# EAGLE board Program_Counter (EAGLE 9.3.2)
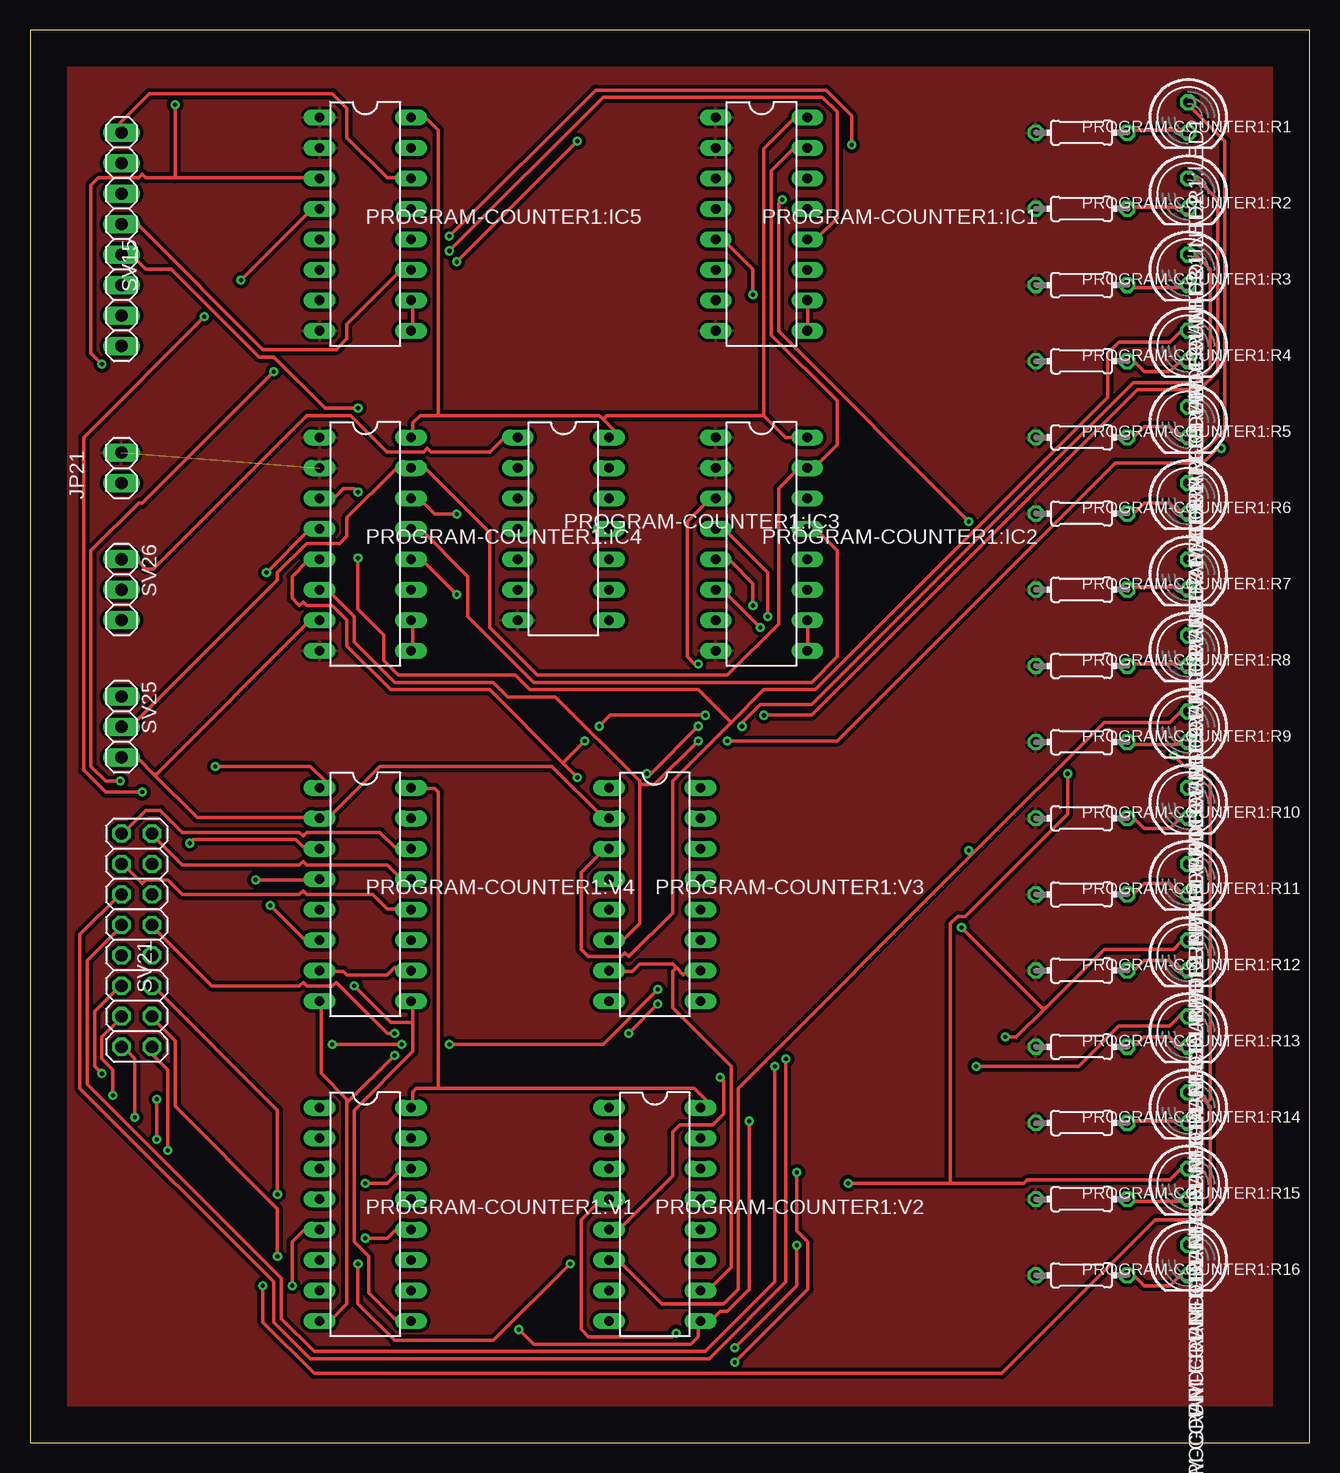
[diagram p0: board, top side]
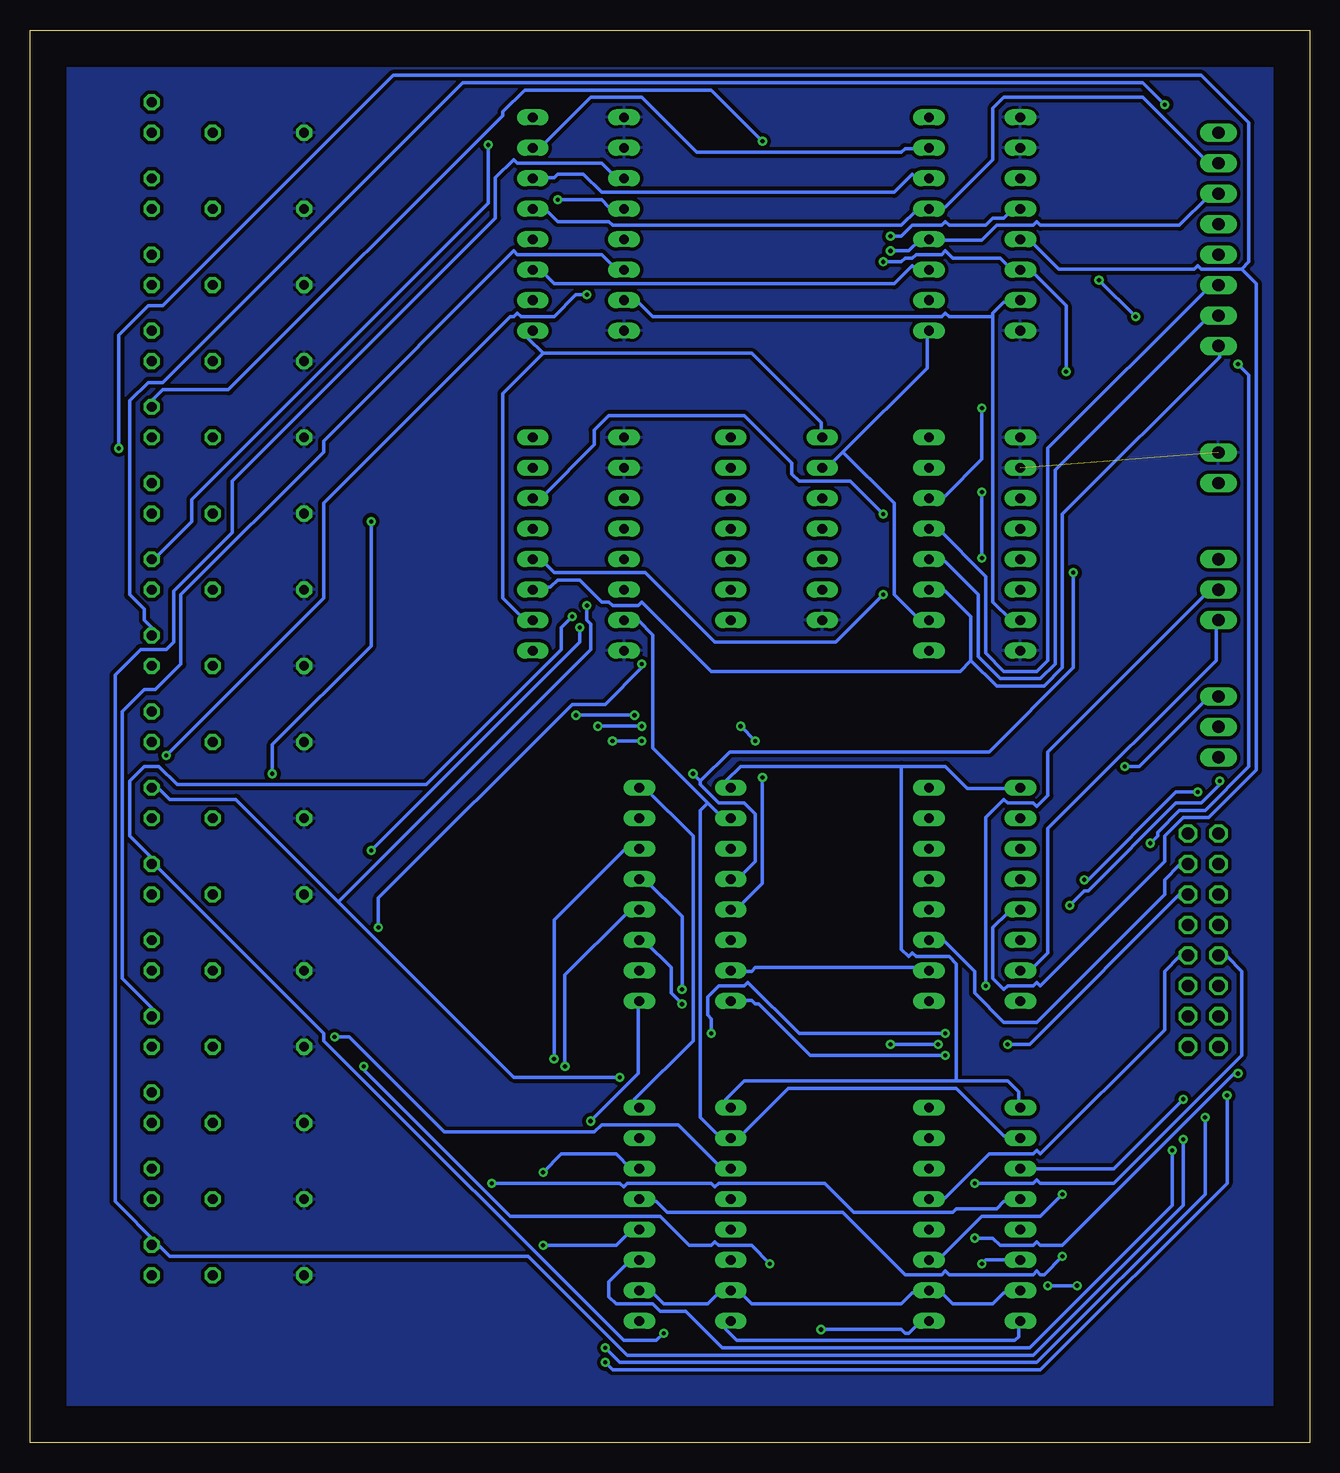
[diagram p1: board, bottom side, seen from below]

Size 106.66 x 117.78 mm. Coordinates in mm from the lower left corner, seen from the top.
Outline: 0,0 106.66,0 106.66,117.78 0,117.78 0,0
Copper layers (1*16): Top 0.035mm / dielectric 1.5mm / Bottom 0.035mm
Design rules "Endustriyel": minimum track width 12mil, minimum drill 0.35mm, track to track 12mil, track to pad 12mil, pad to pad 12mil, via to via 12mil, smd to smd 6mil, copper to edge 120mil, drill to drill 12mil, minimum pad ring 10mil, minimum via ring 8mil, stop-mask expansion 4mil, vias tented up to drill 0mil, thermal gap 10mil
Net classes: 0 default: width 0.254 mm

## Footprints (pad centres in the part's own frame; a part is rotated, then mirrored left to right if it is on the bottom)
1X02 = drill 1.016 long: 1 -1.27,0; 2 1.27,0
DIL16 = drill 0.813 long: 1 -8.89,-3.81; 2 -6.35,-3.81; 3 -3.81,-3.81; 4 -1.27,-3.81; 5 1.27,-3.81; 6 3.81,-3.81; 7 6.35,-3.81; 8 8.89,-3.81; 9 8.89,3.81; 10 6.35,3.81; 11 3.81,3.81; 12 1.27,3.81; 13 -1.27,3.81; 14 -3.81,3.81; 15 -6.35,3.81; 16 -8.89,3.81
DIL14 = drill 0.813 long: 1 -7.62,-3.81; 2 -5.08,-3.81; 3 -2.54,-3.81; 4 0,-3.81; 5 2.54,-3.81; 6 5.08,-3.81; 7 7.62,-3.81; 8 7.62,3.81; 9 5.08,3.81; 10 2.54,3.81; 11 0,3.81; 12 -2.54,3.81; 13 -5.08,3.81; 14 -7.62,3.81
LED5MM = drill 0.813 octagon: A -1.27,0; K 1.27,0
0204/7 = drill 0.813 octagon: 1 -3.81,0; 2 3.81,0
1X08 = drill 1.016 long: 1 -8.89,0; 2 -6.35,0; 3 -3.81,0; 4 -1.27,0; 5 1.27,0; 6 3.81,0; 7 6.35,0; 8 8.89,0
2X08 = drill 1.016 octagon: 1 -8.89,-1.27; 2 -8.89,1.27; 3 -6.35,-1.27; 4 -6.35,1.27; 5 -3.81,-1.27; 6 -3.81,1.27; 7 -1.27,-1.27; 8 -1.27,1.27; 9 1.27,-1.27; 10 1.27,1.27; 11 3.81,-1.27; 12 3.81,1.27; 13 6.35,-1.27; 14 6.35,1.27; 15 8.89,-1.27; 16 8.89,1.27
1X03 = drill 1.016 long: 1 -2.54,0; 2 0,0; 3 2.54,0

## Placement (x,y rotation side)
JP21  [1X02]  7.62,81.28 90 top
PROGRAM-COUNTER1:IC1  74HC173N  [DIL16]  60.96,101.6 270 top
PROGRAM-COUNTER1:IC2  74HC173N  [DIL16]  60.96,74.93 270 top
PROGRAM-COUNTER1:IC3  74AC04N  [DIL14]  44.45,76.2 270 top
PROGRAM-COUNTER1:IC4  74HC173N  [DIL16]  27.94,74.93 270 top
PROGRAM-COUNTER1:IC5  74HC173N  [DIL16]  27.94,101.6 270 top
PROGRAM-COUNTER1:LED1  [LED5MM]  96.52,110.49 270 top
PROGRAM-COUNTER1:LED2  [LED5MM]  96.52,104.14 270 top
PROGRAM-COUNTER1:LED3  [LED5MM]  96.52,97.79 270 top
PROGRAM-COUNTER1:LED4  [LED5MM]  96.52,91.44 270 top
PROGRAM-COUNTER1:LED5  [LED5MM]  96.52,85.09 270 top
PROGRAM-COUNTER1:LED6  [LED5MM]  96.52,78.74 270 top
PROGRAM-COUNTER1:LED7  [LED5MM]  96.52,72.39 270 top
PROGRAM-COUNTER1:LED8  [LED5MM]  96.52,66.04 270 top
PROGRAM-COUNTER1:LED9  [LED5MM]  96.52,59.69 270 top
PROGRAM-COUNTER1:LED10  [LED5MM]  96.52,53.34 270 top
PROGRAM-COUNTER1:LED11  [LED5MM]  96.52,46.99 270 top
PROGRAM-COUNTER1:LED12  [LED5MM]  96.52,40.64 270 top
PROGRAM-COUNTER1:LED13  [LED5MM]  96.52,34.29 270 top
PROGRAM-COUNTER1:LED14  [LED5MM]  96.52,27.94 270 top
PROGRAM-COUNTER1:LED15  [LED5MM]  96.52,21.59 270 top
PROGRAM-COUNTER1:LED16  [LED5MM]  96.52,15.24 270 top
PROGRAM-COUNTER1:R1  220  [0204/7]  87.63,109.22 0 top
PROGRAM-COUNTER1:R2  220  [0204/7]  87.63,102.87 0 top
PROGRAM-COUNTER1:R3  220  [0204/7]  87.63,96.52 0 top
PROGRAM-COUNTER1:R4  220  [0204/7]  87.63,90.17 0 top
PROGRAM-COUNTER1:R5  220  [0204/7]  87.63,83.82 0 top
PROGRAM-COUNTER1:R6  220  [0204/7]  87.63,77.47 0 top
PROGRAM-COUNTER1:R7  220  [0204/7]  87.63,71.12 0 top
PROGRAM-COUNTER1:R8  220  [0204/7]  87.63,64.77 0 top
PROGRAM-COUNTER1:R9  220  [0204/7]  87.63,58.42 0 top
PROGRAM-COUNTER1:R10  220  [0204/7]  87.63,52.07 0 top
PROGRAM-COUNTER1:R11  220  [0204/7]  87.63,45.72 0 top
PROGRAM-COUNTER1:R12  220  [0204/7]  87.63,39.37 0 top
PROGRAM-COUNTER1:R13  220  [0204/7]  87.63,33.02 0 top
PROGRAM-COUNTER1:R14  220  [0204/7]  87.63,26.67 0 top
PROGRAM-COUNTER1:R15  220  [0204/7]  87.63,20.32 0 top
PROGRAM-COUNTER1:R16  220  [0204/7]  87.63,13.97 0 top
PROGRAM-COUNTER1:V1  74161N  [DIL16]  27.94,19.05 270 top
PROGRAM-COUNTER1:V2  74161N  [DIL16]  52.07,19.05 270 top
PROGRAM-COUNTER1:V3  74161N  [DIL16]  52.07,45.72 270 top
PROGRAM-COUNTER1:V4  74161N  [DIL16]  27.94,45.72 270 top
SV15  [1X08]  7.62,100.33 270 top
SV21  [2X08]  8.89,41.91 270 top
SV25  [1X03]  7.62,59.69 270 top
SV26  [1X03]  7.62,71.12 270 top

## Library data of the parts
JP21 = pinhead
PROGRAM-COUNTER1:IC1-PROGRAM-COUNTER1:IC5 = 74xx-eu
PROGRAM-COUNTER1:LED1-PROGRAM-COUNTER1:LED16 = led
PROGRAM-COUNTER1:R1-PROGRAM-COUNTER1:R16 = rcl; SPICEPREFIX: R
PROGRAM-COUNTER1:V1-PROGRAM-COUNTER1:V4 = 74ttl-din
SV15 SV21 SV25 SV26 = pinhead; OC_FARNELL: unknown; OC_NEWARK: unknown

## Nets
8B_1: PROGRAM-COUNTER1:IC1.14 PROGRAM-COUNTER1:IC5.14 SV15.1
8B_2: PROGRAM-COUNTER1:IC1.13 PROGRAM-COUNTER1:IC5.13 SV15.2
8B_3: PROGRAM-COUNTER1:IC1.12 PROGRAM-COUNTER1:IC5.12 SV15.3
8B_4: PROGRAM-COUNTER1:IC1.11 PROGRAM-COUNTER1:IC5.11 SV15.4
8B_5: PROGRAM-COUNTER1:IC2.14 PROGRAM-COUNTER1:IC4.14 SV15.5
8B_6: PROGRAM-COUNTER1:IC2.13 PROGRAM-COUNTER1:IC4.13 SV15.6
8B_7: PROGRAM-COUNTER1:IC2.12 PROGRAM-COUNTER1:IC4.12 SV15.7
8B_8: PROGRAM-COUNTER1:IC2.11 PROGRAM-COUNTER1:IC4.11 SV15.8
CLK: PROGRAM-COUNTER1:IC1.7 PROGRAM-COUNTER1:IC2.7 PROGRAM-COUNTER1:IC4.7 PROGRAM-COUNTER1:IC5.7 PROGRAM-COUNTER1:V1.2 PROGRAM-COUNTER1:V2.2 PROGRAM-COUNTER1:V3.2 PROGRAM-COUNTER1:V4.2 SV25.3
CLR: PROGRAM-COUNTER1:IC1.15 PROGRAM-COUNTER1:IC2.15 PROGRAM-COUNTER1:IC4.15 PROGRAM-COUNTER1:IC5.15 SV25.2
COUNT: PROGRAM-COUNTER1:V1.7 PROGRAM-COUNTER1:V1.10 PROGRAM-COUNTER1:V2.7 PROGRAM-COUNTER1:V2.10 PROGRAM-COUNTER1:V3.7 PROGRAM-COUNTER1:V3.10 PROGRAM-COUNTER1:V4.7 PROGRAM-COUNTER1:V4.10 SV26.3
GND: JP21.2 PROGRAM-COUNTER1:IC1.1 PROGRAM-COUNTER1:IC1.2 PROGRAM-COUNTER1:IC1.8 PROGRAM-COUNTER1:IC2.1 PROGRAM-COUNTER1:IC2.2 PROGRAM-COUNTER1:IC2.8 PROGRAM-COUNTER1:IC3.7 PROGRAM-COUNTER1:IC4.1 PROGRAM-COUNTER1:IC4.2 PROGRAM-COUNTER1:IC4.8 PROGRAM-COUNTER1:IC5.1 PROGRAM-COUNTER1:IC5.2 PROGRAM-COUNTER1:IC5.8 PROGRAM-COUNTER1:R1.1 PROGRAM-COUNTER1:R2.1 PROGRAM-COUNTER1:R3.1 PROGRAM-COUNTER1:R4.1 PROGRAM-COUNTER1:R5.1 PROGRAM-COUNTER1:R6.1 PROGRAM-COUNTER1:R7.1 PROGRAM-COUNTER1:R8.1 PROGRAM-COUNTER1:R9.1 PROGRAM-COUNTER1:R10.1 PROGRAM-COUNTER1:R11.1 PROGRAM-COUNTER1:R12.1 PROGRAM-COUNTER1:R13.1 PROGRAM-COUNTER1:R14.1 PROGRAM-COUNTER1:R15.1 PROGRAM-COUNTER1:R16.1
N$1: PROGRAM-COUNTER1:V4.14 SV21.1
N$2: PROGRAM-COUNTER1:V4.13 SV21.2
N$3: PROGRAM-COUNTER1:V4.12 SV21.3
N$4: PROGRAM-COUNTER1:V4.11 SV21.4
N$5: PROGRAM-COUNTER1:V3.14 SV21.5
N$6: PROGRAM-COUNTER1:V3.13 SV21.6
N$7: PROGRAM-COUNTER1:V3.12 SV21.7
N$8: PROGRAM-COUNTER1:V3.11 SV21.8
N$9: PROGRAM-COUNTER1:V1.14 SV21.9
N$10: PROGRAM-COUNTER1:V1.13 SV21.10
N$11: PROGRAM-COUNTER1:V1.12 SV21.11
N$12: PROGRAM-COUNTER1:V1.11 SV21.12
N$13: PROGRAM-COUNTER1:V2.14 SV21.13
N$14: PROGRAM-COUNTER1:V2.13 SV21.14
N$15: PROGRAM-COUNTER1:V2.12 SV21.15
N$16: PROGRAM-COUNTER1:V2.11 SV21.16
PC_LE: PROGRAM-COUNTER1:V1.9 PROGRAM-COUNTER1:V2.9 PROGRAM-COUNTER1:V3.9 PROGRAM-COUNTER1:V4.9 SV26.2
PC_LRS: PROGRAM-COUNTER1:IC1.9 PROGRAM-COUNTER1:IC1.10 PROGRAM-COUNTER1:IC2.9 PROGRAM-COUNTER1:IC2.10 PROGRAM-COUNTER1:IC3.1 SV26.1
PROGRAM-COUNTER1:+UB: PROGRAM-COUNTER1:V1.16 PROGRAM-COUNTER1:V2.16 PROGRAM-COUNTER1:V3.16 PROGRAM-COUNTER1:V4.16
PROGRAM-COUNTER1:-UB: PROGRAM-COUNTER1:V1.8 PROGRAM-COUNTER1:V2.8 PROGRAM-COUNTER1:V3.8 PROGRAM-COUNTER1:V4.8
PROGRAM-COUNTER1:N$1: PROGRAM-COUNTER1:IC1.6 PROGRAM-COUNTER1:LED13.A PROGRAM-COUNTER1:V1.6
PROGRAM-COUNTER1:N$2: PROGRAM-COUNTER1:IC2.6 PROGRAM-COUNTER1:LED9.A PROGRAM-COUNTER1:V2.6
PROGRAM-COUNTER1:N$3: PROGRAM-COUNTER1:IC2.5 PROGRAM-COUNTER1:LED10.A PROGRAM-COUNTER1:V2.5
PROGRAM-COUNTER1:N$4: PROGRAM-COUNTER1:IC2.4 PROGRAM-COUNTER1:LED11.A PROGRAM-COUNTER1:V2.4
PROGRAM-COUNTER1:N$5: PROGRAM-COUNTER1:IC2.3 PROGRAM-COUNTER1:LED12.A PROGRAM-COUNTER1:V2.3
PROGRAM-COUNTER1:N$6: PROGRAM-COUNTER1:IC1.5 PROGRAM-COUNTER1:LED14.A PROGRAM-COUNTER1:V1.5
PROGRAM-COUNTER1:N$7: PROGRAM-COUNTER1:IC1.4 PROGRAM-COUNTER1:LED15.A PROGRAM-COUNTER1:V1.4
PROGRAM-COUNTER1:N$8: PROGRAM-COUNTER1:IC1.3 PROGRAM-COUNTER1:LED16.A PROGRAM-COUNTER1:V1.3
PROGRAM-COUNTER1:N$17: PROGRAM-COUNTER1:IC4.6 PROGRAM-COUNTER1:LED1.A PROGRAM-COUNTER1:V3.6
PROGRAM-COUNTER1:N$18: PROGRAM-COUNTER1:IC4.5 PROGRAM-COUNTER1:LED2.A PROGRAM-COUNTER1:V3.5
PROGRAM-COUNTER1:N$19: PROGRAM-COUNTER1:IC4.4 PROGRAM-COUNTER1:LED3.A PROGRAM-COUNTER1:V3.4
PROGRAM-COUNTER1:N$20: PROGRAM-COUNTER1:IC4.3 PROGRAM-COUNTER1:LED4.A PROGRAM-COUNTER1:V3.3
PROGRAM-COUNTER1:N$25: PROGRAM-COUNTER1:IC5.6 PROGRAM-COUNTER1:LED5.A PROGRAM-COUNTER1:V4.6
PROGRAM-COUNTER1:N$26: PROGRAM-COUNTER1:IC5.5 PROGRAM-COUNTER1:LED6.A PROGRAM-COUNTER1:V4.5
PROGRAM-COUNTER1:N$27: PROGRAM-COUNTER1:IC5.4 PROGRAM-COUNTER1:LED7.A PROGRAM-COUNTER1:V4.4
PROGRAM-COUNTER1:N$28: PROGRAM-COUNTER1:IC5.3 PROGRAM-COUNTER1:LED8.A PROGRAM-COUNTER1:V4.3
PROGRAM-COUNTER1:N$45: PROGRAM-COUNTER1:LED9.K PROGRAM-COUNTER1:R9.2
PROGRAM-COUNTER1:N$46: PROGRAM-COUNTER1:LED10.K PROGRAM-COUNTER1:R10.2
PROGRAM-COUNTER1:N$47: PROGRAM-COUNTER1:LED11.K PROGRAM-COUNTER1:R11.2
PROGRAM-COUNTER1:N$48: PROGRAM-COUNTER1:LED12.K PROGRAM-COUNTER1:R12.2
PROGRAM-COUNTER1:N$49: PROGRAM-COUNTER1:LED13.K PROGRAM-COUNTER1:R13.2
PROGRAM-COUNTER1:N$50: PROGRAM-COUNTER1:LED14.K PROGRAM-COUNTER1:R14.2
PROGRAM-COUNTER1:N$51: PROGRAM-COUNTER1:LED15.K PROGRAM-COUNTER1:R15.2
PROGRAM-COUNTER1:N$52: PROGRAM-COUNTER1:LED16.K PROGRAM-COUNTER1:R16.2
PROGRAM-COUNTER1:N$53: PROGRAM-COUNTER1:LED1.K PROGRAM-COUNTER1:R1.2
PROGRAM-COUNTER1:N$54: PROGRAM-COUNTER1:LED2.K PROGRAM-COUNTER1:R2.2
PROGRAM-COUNTER1:N$55: PROGRAM-COUNTER1:LED3.K PROGRAM-COUNTER1:R3.2
PROGRAM-COUNTER1:N$56: PROGRAM-COUNTER1:LED4.K PROGRAM-COUNTER1:R4.2
PROGRAM-COUNTER1:N$57: PROGRAM-COUNTER1:LED5.K PROGRAM-COUNTER1:R5.2
PROGRAM-COUNTER1:N$58: PROGRAM-COUNTER1:LED6.K PROGRAM-COUNTER1:R6.2
PROGRAM-COUNTER1:N$59: PROGRAM-COUNTER1:LED7.K PROGRAM-COUNTER1:R7.2
PROGRAM-COUNTER1:N$60: PROGRAM-COUNTER1:LED8.K PROGRAM-COUNTER1:R8.2
PROGRAM-COUNTER1:VCC: PROGRAM-COUNTER1:IC1.16 PROGRAM-COUNTER1:IC2.16 PROGRAM-COUNTER1:IC3.14 PROGRAM-COUNTER1:IC4.16 PROGRAM-COUNTER1:IC5.16
PROGRAM-COUNTER1:|LRS: PROGRAM-COUNTER1:IC3.2 PROGRAM-COUNTER1:IC4.9 PROGRAM-COUNTER1:IC4.10 PROGRAM-COUNTER1:IC5.9 PROGRAM-COUNTER1:IC5.10
VCC: JP21.1
|CLR: PROGRAM-COUNTER1:V1.1 PROGRAM-COUNTER1:V2.1 PROGRAM-COUNTER1:V3.1 PROGRAM-COUNTER1:V4.1 SV25.1

## Tracks (layer width: path | path; a pad name or v marks a point on that pad's centre or on a via)
8B_1
  Top 0.305: PROGRAM-COUNTER1:IC5.14 31.6,105.46 29.77,105.46 26.42,108.81 26.42,111.25 25.2,112.47 9.96,112.47 7.52,110.03 7.52,109.42 SV15.1
  Bottom 0.305: PROGRAM-COUNTER1:IC1.14 64.52,105.46 62.99,105.46 62.69,105.77 60.55,105.77 59.03,104.24 34.65,104.24 33.12,105.77 32.82,105.46 31.9,105.46 PROGRAM-COUNTER1:IC5.14
8B_2
  Bottom 0.305: SV15.2 8.43,106.68 13.92,112.17 25.5,112.17 26.42,111.25 26.42,106.98 30.38,103.02 31.6,103.02 PROGRAM-COUNTER1:IC5.13 31.9,102.72 32.82,102.72 34.04,101.5 58.12,101.5 58.42,101.8 62.69,101.8 63.6,102.72 64.52,102.72 PROGRAM-COUNTER1:IC1.13
8B_3  (via drill 0.35)
  Top 0.305: v34.95,99.36 47.75,112.17 66.04,112.17 67.26,110.95 67.26,102.11 65.73,100.58 64.82,100.58 PROGRAM-COUNTER1:IC1.12
  Bottom 0.305: SV15.3 7.82,103.94 8.43,103.94 10.87,101.5 22.45,101.5 22.76,101.8 23.06,101.5 26.11,101.5 27.33,100.28 31.6,100.28 PROGRAM-COUNTER1:IC5.12 31.9,100.28 32.51,100.28 33.43,99.36 v34.95,99.36
8B_4
  Top 0.305: PROGRAM-COUNTER1:IC5.11 31.6,97.54 30.68,97.54 26.42,93.27 26.42,92.05 25.5,91.13 19.41,91.13 9.04,101.5 7.82,101.5 SV15.4
  Bottom 0.305: PROGRAM-COUNTER1:IC1.11 64.52,97.54 63.91,97.54 62.99,96.62 34.65,96.62 33.12,98.15 32.82,97.84 31.9,97.84 PROGRAM-COUNTER1:IC5.11
8B_5  (via drill 0.35)
  Top 0.305: v27.33,86.26 24.59,86.26 20.32,90.53 19.1,90.53 11.79,97.84 9.65,97.84 8.43,99.06 SV15.5 | v35.56,77.42 33.73,77.42 32.51,78.64 31.9,78.64 PROGRAM-COUNTER1:IC4.14
  Bottom 0.305: v27.33,86.26 27.33,81.99 30.38,78.94 31.6,78.94 PROGRAM-COUNTER1:IC4.14 | v35.56,77.42 38.3,80.16 42.57,80.16 43.18,80.77 43.18,81.69 47.14,85.65 58.42,85.65 59.64,84.43 59.64,83.21 63.91,78.94 64.52,78.94 PROGRAM-COUNTER1:IC2.14
8B_6
  Top 0.305: PROGRAM-COUNTER1:IC2.13 65.43,76.2 67.26,74.37 67.26,65.53 65.13,63.4 41.96,63.4 36.47,68.88 36.47,72.24 32.51,76.2 PROGRAM-COUNTER1:IC4.13
  Bottom 0.305: PROGRAM-COUNTER1:IC4.13 30.99,76.2 27.03,72.24 27.03,65.84 25.5,64.31 22.76,64.31 21.84,65.23 21.84,82.91 8.43,96.32 7.82,96.32 SV15.6
8B_7  (via drill 0.35)
  Top 0.305: v35.56,70.71 32.82,73.46 31.9,73.46 PROGRAM-COUNTER1:IC4.12
  Bottom 0.305: PROGRAM-COUNTER1:IC4.12 31.6,73.46 30.38,73.46 27.64,70.71 27.64,65.53 25.81,63.7 22.45,63.7 21.23,64.92 21.23,81.08 8.43,93.88 7.82,93.88 SV15.7 | v35.56,70.71 39.52,66.75 49.58,66.75 55.37,72.54 62.99,72.54 63.91,73.46 64.52,73.46 PROGRAM-COUNTER1:IC2.12
8B_8
  Bottom 0.305: 28.25,65.23 28.25,68.88 30.38,71.02 31.6,71.02 PROGRAM-COUNTER1:IC4.11 | 28.25,65.23 26.11,63.09 22.15,63.09 20.62,64.62 20.62,77.42 7.52,90.53 7.52,91.44 SV15.8 | 28.25,65.23 29.16,64.31 49.89,64.31 55.68,70.1 55.98,69.8 58.12,69.8 58.42,70.1 59.03,70.1 60.86,71.93 62.69,71.93 63.3,71.32 64.52,71.32 PROGRAM-COUNTER1:IC2.11
CLK
  Top 0.305: 10.26,55.78 9.04,57 7.82,57 SV25.3 | 10.26,55.78 13.92,52.12 23.98,52.12 PROGRAM-COUNTER1:V4.2 24.28,52.12 24.89,52.12 29.16,56.39 43.48,56.39 47.75,52.12 48.06,52.12 PROGRAM-COUNTER1:V3.2 | PROGRAM-COUNTER1:IC4.7 23.37,68.58 10.57,55.78 10.26,55.78
  Bottom 0.305: PROGRAM-COUNTER1:V1.2 24.28,25.6 25.5,25.6 29.46,29.57 43.48,29.57 47.45,25.6 48.06,25.6 PROGRAM-COUNTER1:V2.2 48.36,25.6 49.28,25.6 50.8,27.13 50.8,52.73 50.19,53.34 | 50.19,53.34 54.76,57.91 54.76,67.36 55.98,68.58 PROGRAM-COUNTER1:IC2.7 | 50.19,53.34 48.97,52.12 48.36,52.12 PROGRAM-COUNTER1:V3.2 | 26.42,93.88 26.42,70.1 24.89,68.58 PROGRAM-COUNTER1:IC4.7 | 26.42,93.88 26.42,94.18 25.5,95.1 24.28,95.1 PROGRAM-COUNTER1:IC5.7 | 26.42,93.88 30.07,93.88 30.38,94.18 30.68,93.88 54.76,93.88 55.98,95.1 56.9,95.1 PROGRAM-COUNTER1:IC1.7
CLR
  Top 0.305: SV25.2 7.82,59.74 8.43,59.74 20.62,71.93 20.62,72.54 23.06,74.98 25.81,74.98 26.42,75.59 26.42,77.11 30.38,81.08 31.6,81.08 PROGRAM-COUNTER1:IC4.15 31.9,81.08 33.12,81.08 38.3,75.89 38.3,67.97 42.27,64.01 58.12,64.01 62.38,68.27 62.38,79.55 63.91,81.08 64.52,81.08 PROGRAM-COUNTER1:IC2.15 64.82,81.38 65.43,81.38 67.26,83.21 67.26,86.87 61.77,92.35 61.77,106.07 63.6,107.9 64.52,107.9 PROGRAM-COUNTER1:IC1.15
  Bottom 0.305: PROGRAM-COUNTER1:IC5.15 31.9,107.9 33.73,107.9 34.04,107.59 51.11,107.59 55.68,112.17 59.94,112.17 63.91,108.2 64.52,108.2 PROGRAM-COUNTER1:IC1.15
COUNT
  Top 0.305: 53.85,39.62 54.46,39.01 54.76,39.32 55.68,39.32 PROGRAM-COUNTER1:V3.10 | 53.85,39.62 53.54,39.93 50.8,39.93 50.19,39.32 48.36,39.32 PROGRAM-COUNTER1:V3.7 | PROGRAM-COUNTER1:V4.7 24.28,39.32 26.11,39.32 26.42,39.01 29.77,39.01 30.38,39.62 31.6,39.62 PROGRAM-COUNTER1:V4.10 | 53.85,39.62 53.54,39.32 53.54,36.27 58.42,31.39 58.42,14.63 56.59,12.8 55.98,12.8 PROGRAM-COUNTER1:V2.10
  Bottom 0.305: PROGRAM-COUNTER1:V1.7 24.28,12.5 25.5,12.5 26.42,11.58 29.77,11.58 30.68,12.5 31.6,12.5 PROGRAM-COUNTER1:V1.10 31.9,12.5 33.12,12.5 34.04,11.58 46.53,11.58 47.45,12.5 48.06,12.5 PROGRAM-COUNTER1:V2.7 48.36,12.5 49.28,12.5 50.19,11.58 53.85,11.58 54.76,12.5 55.68,12.5 PROGRAM-COUNTER1:V2.10 | SV26.3 7.82,68.58 7.82,65.23 21.84,51.21 21.84,40.84 23.06,39.62 23.98,39.62 PROGRAM-COUNTER1:V4.7 | PROGRAM-COUNTER1:V3.7 48.06,39.32 46.53,39.32 46.23,39.62 31.9,39.62 PROGRAM-COUNTER1:V4.10
GND  (1 unrouted)
  pour Bottom: -2.54,120.65 109.22,120.65 109.22,-2.54 -2.54,-2.54
  pour Top: -5.08,121.92 -5.08,-6.35 111.76,-6.35 111.76,121.92
N$1
  Top 0.305: PROGRAM-COUNTER1:V4.14 31.6,49.68 30.38,49.68 29.16,50.9 23.06,50.9 22.76,50.6 22.45,50.9 12.7,50.9 10.87,52.73 9.65,52.73 8.13,51.21 7.82,51.21 7.52,50.9 SV21.1
N$2
  Top 0.305: PROGRAM-COUNTER1:V4.13 31.6,47.24 30.68,47.24 29.77,48.16 23.06,48.16 22.76,48.46 22.45,48.16 12.7,48.16 10.57,50.29 10.26,50.29 9.96,50.6 SV21.2
N$3
  Top 0.305: PROGRAM-COUNTER1:V4.12 31.6,44.5 29.77,44.5 28.55,45.72 23.06,45.72 22.76,46.03 22.45,45.72 12.7,45.72 11.48,46.94 9.65,46.94 9.35,46.63 8.13,47.85 7.82,47.85 7.52,48.16 SV21.3
N$4
  Bottom 0.305: PROGRAM-COUNTER1:V4.11 31.6,41.76 30.38,41.76 27.94,39.32 27.94,37.49 25.5,35.05 22.76,35.05 12.09,45.72 12.09,46.94 10.87,48.16 10.26,48.16 SV21.4
N$5  (via drill 0.35)
  Top 0.305: v62.99,32 62.99,13.41 56.59,7.01 23.37,7.01 20.32,10.06 20.32,13.41 4.17,29.57 4.17,42.37 7.52,45.72 SV21.5
  Bottom 0.305: v62.99,32 62.99,43.59 57.2,49.38 55.98,49.38 PROGRAM-COUNTER1:V3.14
N$6  (via drill 0.35)
  Top 0.305: v52.32,37.8 47.75,33.22 v34.95,33.22 | v25.2,33.22 v30.99,33.22
  Bottom 0.305: v52.32,37.8 52.32,43.89 55.37,46.94 55.68,46.94 PROGRAM-COUNTER1:V3.13 | v30.99,33.22 v34.95,33.22 | v25.2,33.22 23.37,33.22 10.87,45.72 SV21.6
N$7  (via drill 0.35)
  Top 0.305: v62.08,31.39 62.08,13.41 56.29,7.62 23.67,7.62 20.93,10.36 20.93,13.72 4.78,29.87 4.78,40.23 7.21,42.67 7.21,42.98 7.52,43.28 SV21.7
  Bottom 0.305: v62.08,31.39 62.08,39.01 56.9,44.2 55.98,44.2 PROGRAM-COUNTER1:V3.12
N$8  (via drill 0.35)
  Top 0.305: v49.89,34.14 v52.32,36.58 | v30.38,34.14 29.77,34.14 25.5,38.41 25.2,38.1 23.06,38.1 22.76,38.41 22.45,38.1 15.14,38.1 10.57,42.67 10.26,42.67 9.96,42.98 SV21.8
  Bottom 0.305: v52.32,36.58 53.24,37.49 53.24,39.62 55.37,41.76 55.68,41.76 PROGRAM-COUNTER1:V3.11 | v49.89,34.14 49.89,35.36 50.19,35.66 50.19,37.19 49.28,38.1 47.14,38.1 46.84,38.41 42.57,34.14 v30.38,34.14
N$9  (via drill 0.35)
  Top 0.305: PROGRAM-COUNTER1:V1.14 30.99,22.86 29.77,21.64 v27.94,21.64
  Bottom 0.305: v27.94,21.64 23.06,21.64 22.76,21.95 22.45,21.64 16.36,21.64 5.69,32.31 5.69,39.32 6.91,40.54 7.52,40.54 SV21.9
N$10
  Bottom 0.305: PROGRAM-COUNTER1:V1.13 31.6,20.42 30.38,20.42 26.72,24.08 23.06,24.08 22.76,24.38 22.45,24.08 12.09,34.44 12.09,39.32 10.87,40.54 10.26,40.54 SV21.10
N$11  (via drill 0.35)
  Top 0.305: v27.94,17.07 29.77,17.07 30.38,17.68 31.6,17.68 PROGRAM-COUNTER1:V1.12 | v5.99,30.79 5.38,31.39 5.38,35.97 7.52,38.1 SV21.11
  Bottom 0.305: v27.94,17.07 26.42,17.07 25.81,16.46 23.06,16.46 22.76,16.76 22.45,16.46 20.62,16.46 6.3,30.79 v5.99,30.79
N$12  (via drill 0.35)
  Top 0.305: v20.62,20.73 20.62,27.74 10.26,38.1 SV21.12
  Bottom 0.305: PROGRAM-COUNTER1:V1.11 30.99,15.24 27.33,18.9 22.45,18.9 v20.62,20.73
N$13  (via drill 0.35)
  Top 0.305: v63.91,22.55 63.91,17.68 64.82,16.76 64.82,12.8 v58.73,6.71 | v6.91,28.96 6.91,31.09 5.99,32 5.99,33.83 7.21,35.05 7.21,35.36 7.52,35.66 SV21.13
  Bottom 0.305: PROGRAM-COUNTER1:V2.14 56.59,22.86 57.81,24.08 62.38,24.08 v63.91,22.55 | v58.73,6.71 58.12,6.1 22.45,6.1 6.91,21.64 v6.91,28.96
N$14  (via drill 0.35)
  Top 0.305: v20.62,15.54 20.62,19.51 12.09,28.04 12.09,33.53 10.57,35.05 10.26,35.05 9.96,35.36 SV21.14
  Bottom 0.305: v20.62,15.54 22.15,14.02 22.45,14.02 22.76,14.33 23.06,14.02 30.07,14.02 30.38,14.33 30.68,14.02 33.73,14.02 38.91,19.2 53.54,19.2 54.46,20.12 55.68,20.12 PROGRAM-COUNTER1:V2.13
N$15  (via drill 0.35)
  Top 0.305: v63.91,16.46 63.91,13.11 v58.73,7.92 | v8.74,27.13 8.74,32 8.13,32.61 7.82,32.61 7.52,32.92 SV21.15
  Bottom 0.305: v63.91,16.46 57.81,16.46 56.59,17.68 55.98,17.68 PROGRAM-COUNTER1:V2.12 | v58.73,7.92 57.51,6.71 22.76,6.71 8.74,20.73 v8.74,27.13
N$16  (via drill 0.35)
  Top 0.305: v11.48,24.38 11.48,31.09 10.26,32.31 10.26,32.92 SV21.16
  Bottom 0.305: PROGRAM-COUNTER1:V2.11 56.59,15.24 58.42,13.41 58.42,12.19 57.81,11.58 54.76,11.58 54.15,10.97 52.02,10.97 48.97,7.92 23.37,7.92 11.48,19.81 v11.48,24.38
PC_LE  (via drill 0.35)
  Top 0.305: 31.9,35.05 31.9,36.58 PROGRAM-COUNTER1:V4.9 | 31.9,35.05 31.9,32.61 27.03,27.74 27.03,16.76 28.25,15.54 28.25,12.5 30.38,10.36 31.6,10.36 PROGRAM-COUNTER1:V1.9 | v40.74,9.45 41.96,8.23 55.07,8.23 55.68,8.84 55.68,10.06 PROGRAM-COUNTER1:V2.9 55.98,10.36 56.9,10.36 57.51,10.97 58.12,10.97 59.94,12.8 v59.94,26.82 | v27.03,38.1 30.07,35.05 31.9,35.05
  Bottom 0.305: v40.74,9.45 34.04,9.45 33.73,9.14 33.43,9.14 32.51,10.06 31.9,10.06 PROGRAM-COUNTER1:V1.9 | v59.94,26.82 55.98,30.79 55.98,36.58 PROGRAM-COUNTER1:V3.9 | v27.03,38.1 27.03,52.12 25.5,53.65 25.2,53.34 23.06,53.34 22.76,53.04 21.84,53.95 21.84,57.61 8.43,71.02 7.82,71.02 SV26.2
PC_LRS
  Top 0.305: PROGRAM-COUNTER1:IC2.9 64.82,66.14 64.82,68.58 PROGRAM-COUNTER1:IC2.10 | PROGRAM-COUNTER1:IC1.10 64.82,95.1 64.82,92.96 PROGRAM-COUNTER1:IC1.9 | PROGRAM-COUNTER1:IC3.1 39.52,83.82 38.3,82.6 33.43,82.6 33.12,82.91 32.82,82.6 29.77,82.6 26.72,85.65 23.06,85.65 10.26,72.85 9.65,72.85 9.04,73.46 7.82,73.46 SV26.1
  Bottom 0.305: 63.91,90.83 46.53,90.83 40.74,85.04 40.74,83.82 PROGRAM-COUNTER1:IC3.1 | 63.91,90.83 65.13,92.05 65.13,92.35 PROGRAM-COUNTER1:IC1.9 | PROGRAM-COUNTER1:IC2.10 65.43,68.58 67.26,70.41 67.26,87.48 63.91,90.83
PROGRAM-COUNTER1:+UB
  Top 0.305: 34.04,29.57 55.37,29.57 56.29,28.65 56.29,28.35 PROGRAM-COUNTER1:V2.16 | 34.04,29.57 32.21,29.57 31.9,29.26 31.9,28.04 PROGRAM-COUNTER1:V1.16 | 34.04,29.57 34.04,54.25 33.73,54.56 31.9,54.56 PROGRAM-COUNTER1:V4.16
  Bottom 0.305: PROGRAM-COUNTER1:V2.16 56.29,28.35 56.29,28.65 51.41,33.53 51.41,50.6 55.37,54.56 55.68,54.56 PROGRAM-COUNTER1:V3.16
PROGRAM-COUNTER1:-UB  (via drill 0.35)
  Top 0.305: 26.42,28.35 26.42,11.58 25.2,10.36 24.28,10.36 PROGRAM-COUNTER1:V1.8 | 26.42,28.35 26.42,28.65 24.28,30.79 24.28,36.58 PROGRAM-COUNTER1:V4.8 | 26.42,28.35 v30.38,32.31
  Bottom 0.305: PROGRAM-COUNTER1:V2.8 48.67,9.75 48.67,9.45 47.75,8.53 24.59,8.53 24.28,8.84 24.28,10.06 PROGRAM-COUNTER1:V1.8 | v30.38,32.31 41.66,32.31 45.92,36.58 46.23,36.58 46.53,36.88 48.06,36.88 PROGRAM-COUNTER1:V3.8
PROGRAM-COUNTER1:N$1  (via drill 0.35)
  Top 0.305: v27.33,14.93 27.33,11.58 30.38,8.53 38.61,8.53 v45.01,14.93 | v78.84,31.39 87.38,31.39 90.73,34.75 95,34.75 95.91,35.66 96.52,35.66 PROGRAM-COUNTER1:LED13.A
  Bottom 0.305: PROGRAM-COUNTER1:V1.6 27.03,15.24 v27.33,14.93 | v45.01,14.93 46.53,16.46 49.28,16.46 49.58,16.76 49.89,16.46 51.71,16.46 54.15,18.9 66.65,18.9 78.84,31.09 v78.84,31.39 | PROGRAM-COUNTER1:LED13.A 96.52,36.27 98.96,38.71 98.96,60.96 97.13,62.79 96.21,62.79 94.08,64.92 94.08,70.71 82.19,82.6 82.19,83.52 66.34,99.36 66.04,99.06 59.03,99.06 57.81,97.84 57.2,97.84 PROGRAM-COUNTER1:IC1.6
PROGRAM-COUNTER1:N$2  (via drill 0.35)
  Top 0.305: PROGRAM-COUNTER1:V2.6 48.97,15.24 52.63,11.58 57.81,11.58 59.03,12.8 59.03,29.57 78.54,49.07 | 78.54,49.07 89.51,60.05 95,60.05 95.91,60.96 PROGRAM-COUNTER1:LED9.A | v60.86,67.97 57.81,71.02 57.2,71.02 PROGRAM-COUNTER1:IC2.6 | 78.54,49.07 v78.23,49.38
  Bottom 0.305: v60.86,67.97 60.86,66.75 v78.23,49.38
PROGRAM-COUNTER1:N$3  (via drill 0.35)
  Top 0.305: v57.51,30.48 57.81,30.18 57.81,27.43 56.9,26.52 54.15,26.52 53.54,25.91 53.54,22.25 49.28,17.98 48.36,17.98 PROGRAM-COUNTER1:V2.5 | v60.25,69.8 60.25,71.63 58.42,73.46 57.2,73.46 PROGRAM-COUNTER1:IC2.5
  Bottom 0.305: v57.51,30.48 66.34,30.48 80.97,45.11 | 80.97,45.11 89.51,53.65 95,53.65 95.91,54.56 96.52,54.56 PROGRAM-COUNTER1:LED10.A | v60.25,69.8 60.25,68.58 59.94,68.27 59.94,66.14 80.97,45.11
PROGRAM-COUNTER1:N$4  (via drill 0.35)
  Top 0.305: v53.85,9.14 53.54,8.84 46.53,8.84 45.92,9.45 45.92,18.59 47.45,20.12 48.06,20.12 PROGRAM-COUNTER1:V2.4 | PROGRAM-COUNTER1:IC2.4 57.81,76.2 61.47,72.54 v61.47,68.88
  Bottom 0.305: v53.85,9.14 54.46,8.53 57.2,8.53 82.19,33.53 82.19,34.14 96.21,48.16 | 96.21,48.16 96.52,48.46 PROGRAM-COUNTER1:LED11.A 96.21,48.16 | v61.47,68.88 62.38,67.97 62.38,66.14 73.66,54.86 94.39,54.86 95.91,56.39 97.13,56.39 98.35,55.17 98.35,50.6 96.21,48.46 96.21,48.16
PROGRAM-COUNTER1:N$5  (via drill 0.35)
  Top 0.305: v81.28,33.83 82.19,33.83 84.63,36.27 | 84.63,36.27 89.51,41.15 95.3,41.15 95.91,41.76 96.52,41.76 PROGRAM-COUNTER1:LED12.A | v55.68,64.92 55.37,64.92 54.76,65.53 54.76,76.81 56.59,78.64 56.9,78.64 PROGRAM-COUNTER1:IC2.3 | v77.62,42.98 84.33,36.27 84.63,36.27
  Bottom 0.305: PROGRAM-COUNTER1:V2.3 48.97,22.86 52.63,26.52 59.03,26.52 59.64,25.91 72.14,25.91 80.06,33.83 v81.28,33.83 | v55.68,64.92 55.68,64.62 58.73,61.57 61.47,61.57 77.62,45.41 v77.62,42.98
PROGRAM-COUNTER1:N$6  (via drill 0.35)
  Top 0.305: v21.84,13.11 21.84,16.76 22.76,17.68 23.98,17.68 PROGRAM-COUNTER1:V1.5 | v19.41,13.11 19.41,10.06 23.67,5.79 80.97,5.79 93.78,18.59 97.13,18.59 98.35,19.81 98.35,28.04 98.04,28.35 | 98.04,28.35 97.13,29.26 96.52,29.26 PROGRAM-COUNTER1:LED14.A | v60.25,95.71 60.25,97.84 57.81,100.28 57.2,100.28 PROGRAM-COUNTER1:IC1.5 | v95.3,57.3 96.21,56.39 97.13,56.39 98.35,55.17 98.35,28.65 98.04,28.35
  Bottom 0.305: v19.41,13.11 v21.84,13.11 | v60.25,95.71 61.16,95.71 62.99,93.88 65.73,93.88 66.04,94.18 66.34,93.88 66.65,93.88 82.19,78.33 82.19,70.41 v95.3,57.3
PROGRAM-COUNTER1:N$7  (via drill 0.35)
  Top 0.305: 76.71,21.64 82.8,21.64 83.11,21.95 95,21.95 95.91,22.86 PROGRAM-COUNTER1:LED15.A | 76.71,21.64 v68.17,21.64 | v62.69,103.63 62.38,103.33 62.38,92.66 v78.23,76.81 | v86.46,55.78 86.46,52.43 77.93,43.89 77.32,43.89 76.71,43.28 76.71,21.64
  Bottom 0.305: v68.17,21.64 57.51,21.64 57.2,21.34 56.9,21.64 49.89,21.64 49.58,21.34 49.28,21.64 40.44,21.64 38,19.2 29.77,19.2 29.46,19.51 26.11,19.51 25.5,20.12 24.28,20.12 PROGRAM-COUNTER1:V1.4 | v62.69,103.63 59.03,103.63 58.42,103.02 57.2,103.02 PROGRAM-COUNTER1:IC1.4 | v78.23,76.81 78.23,66.45 86.46,58.22 v86.46,55.78
PROGRAM-COUNTER1:N$8  (via drill 0.35)
  Top 0.305: v10.57,25.3 v10.57,28.65
  Bottom 0.305: PROGRAM-COUNTER1:V1.3 16.36,22.86 v10.57,28.65 | v10.57,25.3 10.57,19.81 23.06,7.32 56.9,7.32 65.13,15.54 95,15.54 95.91,16.46 | 95.91,16.46 96.52,16.46 PROGRAM-COUNTER1:LED16.A 95.91,16.46 | 95.91,16.46 99.57,20.12 99.57,64.01 97.43,66.14 95.3,66.14 94.69,66.75 94.69,71.02 89.81,75.89 89.81,80.16 67.87,102.11 67.87,105.46 66.34,106.98 66.04,106.68 59.03,106.68 57.81,105.46 57.2,105.46 PROGRAM-COUNTER1:IC1.3
PROGRAM-COUNTER1:N$17  (via drill 0.35)
  Top 0.305: 50.8,54.86 50.8,55.17 43.79,62.18 39.83,62.18 38.61,63.4 30.38,63.4 27.03,66.75 27.03,68.88 24.89,71.02 24.28,71.02 PROGRAM-COUNTER1:IC4.6 | 50.8,54.86 50.8,43.28 49.58,42.06 48.36,42.06 PROGRAM-COUNTER1:V3.6 | v58.12,58.52 67.26,58.52 90.42,81.69 96.82,81.69 99.57,84.43 99.57,108.51 96.52,111.56 PROGRAM-COUNTER1:LED1.A | v55.68,58.52 52.02,54.86 50.8,54.86
  Bottom 0.305: v55.68,58.52 v58.12,58.52
PROGRAM-COUNTER1:N$18  (via drill 0.35)
  Top 0.305: 44.4,56.69 38.3,62.79 30.07,62.79 26.42,66.45 26.42,68.58 25.2,69.8 23.06,69.8 22.76,70.1 22.45,69.8 21.84,70.41 21.84,72.24 23.06,73.46 23.98,73.46 PROGRAM-COUNTER1:IC4.5 | 44.4,56.69 v45.62,55.47 | v61.16,60.66 65.13,60.66 92.25,87.78 97.43,87.78 98.96,89.31 98.96,103.63 97.13,105.46 96.52,105.46 PROGRAM-COUNTER1:LED2.A | v56.29,60.66 48.36,60.66 v47.45,59.74 | 44.4,56.69 v46.23,58.52
  Bottom 0.305: v45.62,55.47 45.62,46.63 47.75,44.5 48.06,44.5 PROGRAM-COUNTER1:V3.5 | v56.29,60.66 v61.16,60.66 | v46.23,58.52 v47.45,59.74
PROGRAM-COUNTER1:N$19  (via drill 0.35)
  Top 0.305: v19.71,72.54 23.37,76.2 PROGRAM-COUNTER1:IC4.4 | PROGRAM-COUNTER1:LED3.A 97.13,99.06 98.35,97.84 98.35,89.61 97.13,88.39 91.95,88.39 65.13,61.57 60.86,61.57 59.33,60.05 v59.33,59.74 | v55.68,59.74 51.71,55.78 v51.41,55.78
  Bottom 0.305: 50.8,55.17 50.8,54.86 49.28,53.34 47.14,53.34 46.23,52.43 46.23,48.46 47.45,47.24 48.06,47.24 PROGRAM-COUNTER1:V3.4 | 50.8,55.17 48.36,57.61 26.72,57.61 19.71,64.62 v19.71,72.54 | v55.68,59.74 v59.33,59.74 | 50.8,55.17 v51.41,55.78
PROGRAM-COUNTER1:N$20  (via drill 0.35)
  Top 0.305: 58.42,60.05 61.16,62.79 65.43,62.79 89.81,87.17 89.81,90.83 90.73,91.74 95,91.74 95.91,92.66 96.52,92.66 PROGRAM-COUNTER1:LED4.A | 58.42,60.05 53.54,55.17 53.54,44.2 49.89,40.54 49.58,40.84 49.28,40.54 46.53,40.54 45.92,41.15 45.92,47.55 47.75,49.38 48.06,49.38 PROGRAM-COUNTER1:V3.3 | v27.33,79.25 27.03,79.55 26.11,79.55 25.5,78.94 24.28,78.94 PROGRAM-COUNTER1:IC4.3 | v27.33,73.76 27.33,69.49 29.46,67.36 29.46,65.23 30.68,64.01 40.44,64.01 41.66,62.79 55.68,62.79 58.42,60.05
  Bottom 0.305: v27.33,73.76 v27.33,79.25
PROGRAM-COUNTER1:N$25  (via drill 0.35)
  Top 0.305: v20.02,44.81 22.76,42.06 23.98,42.06 PROGRAM-COUNTER1:V4.6 | v7.52,55.17 6.3,55.17 5.08,56.39 5.08,74.37 9.04,78.33 9.35,78.33 v20.32,89.31 | v35.56,98.45 v45.62,108.51
  Bottom 0.305: v20.02,44.81 18.8,46.03 18.49,46.03 11.18,53.34 9.04,53.34 7.52,54.86 v7.52,55.17 | v20.32,89.31 20.32,94.79 23.06,97.54 23.98,97.54 PROGRAM-COUNTER1:IC5.6 24.28,97.84 24.89,97.84 25.81,98.75 29.77,98.75 30.38,99.36 30.68,99.06 32.82,99.06 33.12,98.75 33.73,98.75 34.04,98.45 v35.56,98.45 | PROGRAM-COUNTER1:LED5.A 96.52,86.87 95.61,87.78 90.12,87.78 67.26,110.64 67.26,110.95 65.43,112.78 49.89,112.78 v45.62,108.51
PROGRAM-COUNTER1:N$26  (via drill 0.35)
  Top 0.305: PROGRAM-COUNTER1:LED6.A 96.52,80.47 98.96,82.91 v99.26,82.91
  Bottom 0.305: 5.69,97.84 4.47,96.62 4.47,56.08 8.43,52.12 10.57,52.12 12.09,50.6 12.09,48.46 22.45,38.1 22.76,38.41 23.06,38.1 25.2,38.1 25.5,37.8 26.42,38.71 26.42,42.98 25.2,44.2 24.28,44.2 PROGRAM-COUNTER1:V4.5 | 5.69,97.84 9.04,97.84 9.35,98.15 9.65,97.84 20.93,97.84 23.37,100.28 23.98,100.28 PROGRAM-COUNTER1:IC5.5 | v99.26,82.91 99.26,92.35 96.82,94.79 95.61,94.79 76.4,113.99 9.04,113.99 5.08,110.03 5.08,98.45 5.69,97.84
PROGRAM-COUNTER1:N$27  (via drill 0.35)
  Top 0.305: v18.8,46.94 23.98,46.94 PROGRAM-COUNTER1:V4.4 | v9.35,54.25 6.3,54.25 4.47,56.08 4.47,83.82 v14.53,93.88 | v17.58,96.93 23.37,102.72 23.98,102.72 PROGRAM-COUNTER1:IC5.4 | v68.48,108.2 68.48,110.64 66.34,112.78 47.14,112.78 v34.95,100.58
  Bottom 0.305: v18.8,46.94 18.49,46.94 11.18,54.25 v9.35,54.25 | v17.58,96.93 v14.53,93.88 | v68.48,108.2 68.48,103.33 93.17,78.64 93.17,76.81 96.21,73.76 96.52,73.76 PROGRAM-COUNTER1:LED7.A | v34.95,100.58 34.04,100.58 33.12,101.5 30.68,101.5 30.38,101.8 30.07,101.5 27.03,101.5 26.42,102.11 25.5,102.11 24.89,102.72 24.28,102.72 PROGRAM-COUNTER1:IC5.4
PROGRAM-COUNTER1:N$28  (via drill 0.35)
  Top 0.305: v13.31,49.99 13.61,50.29 22.15,50.29 22.76,49.68 23.98,49.68 PROGRAM-COUNTER1:V4.3 | v5.99,89.92 5.08,90.83 5.08,104.85 5.69,105.46 9.04,105.46 9.35,105.77 9.65,105.46 12.09,105.46 | 12.09,105.46 23.98,105.46 PROGRAM-COUNTER1:IC5.3 | 12.09,105.46 v12.09,111.56
  Bottom 0.305: v13.31,49.99 12.7,50.6 12.7,50.9 10.87,52.73 8.74,52.73 5.08,56.39 5.08,89 v5.99,89.92 | PROGRAM-COUNTER1:LED8.A 96.52,67.97 97.13,68.58 97.13,69.49 98.35,70.71 98.35,86.87 96.82,88.39 95.61,88.39 70.61,113.39 13.92,113.39 v12.09,111.56
PROGRAM-COUNTER1:N$45
  Top 0.305: PROGRAM-COUNTER1:R9.2 91.64,58.22 95.61,58.22 95.91,58.52 96.52,58.52 PROGRAM-COUNTER1:LED9.K
PROGRAM-COUNTER1:N$46
  Top 0.305: PROGRAM-COUNTER1:R10.2 91.64,52.12 91.95,52.12 92.86,51.21 95,51.21 95.91,52.12 96.52,52.12 PROGRAM-COUNTER1:LED10.K
PROGRAM-COUNTER1:N$47
  Top 0.305: PROGRAM-COUNTER1:R11.2 91.95,45.72 92.86,46.63 95,46.63 95.91,45.72 PROGRAM-COUNTER1:LED11.K
PROGRAM-COUNTER1:N$48
  Top 0.305: PROGRAM-COUNTER1:R12.2 91.64,39.32 91.95,39.32 92.86,40.23 95,40.23 95.91,39.32 96.52,39.32 PROGRAM-COUNTER1:LED12.K
PROGRAM-COUNTER1:N$49
  Top 0.305: PROGRAM-COUNTER1:R13.2 91.64,33.22 92.25,33.22 92.86,33.83 95,33.83 95.91,32.92 96.52,32.92 PROGRAM-COUNTER1:LED13.K
PROGRAM-COUNTER1:N$50
  Top 0.305: PROGRAM-COUNTER1:R14.2 91.64,26.82 96.52,26.82 PROGRAM-COUNTER1:LED14.K
PROGRAM-COUNTER1:N$51
  Top 0.305: PROGRAM-COUNTER1:R15.2 91.64,20.12 95.61,20.12 95.91,20.42 96.52,20.42 PROGRAM-COUNTER1:LED15.K
PROGRAM-COUNTER1:N$52
  Top 0.305: PROGRAM-COUNTER1:R16.2 91.64,14.02 91.95,14.02 92.86,13.11 95,13.11 95.91,14.02 96.52,14.02 PROGRAM-COUNTER1:LED16.K
PROGRAM-COUNTER1:N$53
  Top 0.305: PROGRAM-COUNTER1:R1.2 91.64,109.42 95.61,109.42 95.91,109.12 96.52,109.12 PROGRAM-COUNTER1:LED1.K
PROGRAM-COUNTER1:N$54
  Top 0.305: PROGRAM-COUNTER1:R2.2 91.64,103.02 96.52,103.02 PROGRAM-COUNTER1:LED2.K
PROGRAM-COUNTER1:N$55
  Top 0.305: PROGRAM-COUNTER1:R3.2 91.64,96.32 95.61,96.32 95.91,96.62 96.52,96.62 PROGRAM-COUNTER1:LED3.K
PROGRAM-COUNTER1:N$56
  Top 0.305: PROGRAM-COUNTER1:R4.2 91.64,90.22 91.95,90.22 92.86,89.31 95,89.31 95.91,90.22 96.52,90.22 PROGRAM-COUNTER1:LED4.K
PROGRAM-COUNTER1:N$57
  Top 0.305: PROGRAM-COUNTER1:R5.2 91.95,83.82 92.86,84.73 95,84.73 95.91,83.82 PROGRAM-COUNTER1:LED5.K
PROGRAM-COUNTER1:N$58
  Top 0.305: PROGRAM-COUNTER1:R6.2 91.64,77.42 91.95,77.42 92.86,78.33 95,78.33 95.91,77.42 96.52,77.42 PROGRAM-COUNTER1:LED6.K
PROGRAM-COUNTER1:N$59
  Top 0.305: PROGRAM-COUNTER1:R7.2 91.64,71.32 95.61,71.32 95.91,71.02 96.52,71.02 PROGRAM-COUNTER1:LED7.K
PROGRAM-COUNTER1:N$60
  Top 0.305: PROGRAM-COUNTER1:R8.2 91.64,64.92 96.52,64.92 PROGRAM-COUNTER1:LED8.K
PROGRAM-COUNTER1:VCC
  Top 0.305: 34.04,85.65 47.45,85.65 47.75,85.34 | 34.04,85.65 32.51,85.65 31.9,85.04 31.9,83.82 PROGRAM-COUNTER1:IC4.16 | 47.75,85.34 48.67,84.43 48.67,84.12 48.36,83.82 PROGRAM-COUNTER1:IC3.14 | 34.04,85.65 34.04,109.42 33.12,110.34 31.9,110.34 PROGRAM-COUNTER1:IC5.16 | PROGRAM-COUNTER1:IC2.16 62.99,83.82 61.16,85.65 | 61.16,85.65 48.06,85.65 47.75,85.34 | 61.16,85.65 61.16,107.9 63.6,110.34 64.52,110.34 PROGRAM-COUNTER1:IC1.16
PROGRAM-COUNTER1:|LRS
  Top 0.305: PROGRAM-COUNTER1:IC4.9 31.9,66.14 31.9,68.58 PROGRAM-COUNTER1:IC4.10 | PROGRAM-COUNTER1:IC5.9 31.9,92.96 31.9,95.1 PROGRAM-COUNTER1:IC5.10
  Bottom 0.305: 38.91,82.6 31.9,89.61 31.9,92.66 PROGRAM-COUNTER1:IC5.9 | 38.91,82.6 40.13,81.38 40.44,81.38 PROGRAM-COUNTER1:IC3.2 | PROGRAM-COUNTER1:IC4.10 32.51,68.58 34.65,70.71 34.65,78.33 38.91,82.6
|CLR  (via drill 0.35)
  Top 0.305: v15.44,56.39 23.37,56.39 24.59,55.17 24.59,54.86 24.28,54.56 PROGRAM-COUNTER1:V4.1
  Bottom 0.305: 29.46,30.18 47.14,30.18 48.67,28.65 48.67,28.35 PROGRAM-COUNTER1:V2.1 | 29.46,30.18 25.2,30.18 24.28,29.26 24.28,28.04 PROGRAM-COUNTER1:V1.1 | 34.04,56.39 47.45,56.39 48.67,55.17 48.67,54.86 48.36,54.56 PROGRAM-COUNTER1:V3.1 | 34.04,56.39 30.38,56.39 28.55,54.56 24.28,54.56 PROGRAM-COUNTER1:V4.1 | v15.44,56.39 14.22,56.39 8.43,62.18 7.82,62.18 SV25.1 | 29.46,30.18 29.46,39.93 30.07,40.54 32.82,40.54 33.12,40.84 33.43,40.54 34.04,41.15 34.04,56.39

## Text on the board
tValues: 8Bit Bus | Control Signals | Address | 16Bit Bus | Program Counter/Program Sayıcı